# EAGLE board MMU_V101r3 (EAGLE 5.11), part 1 of 2
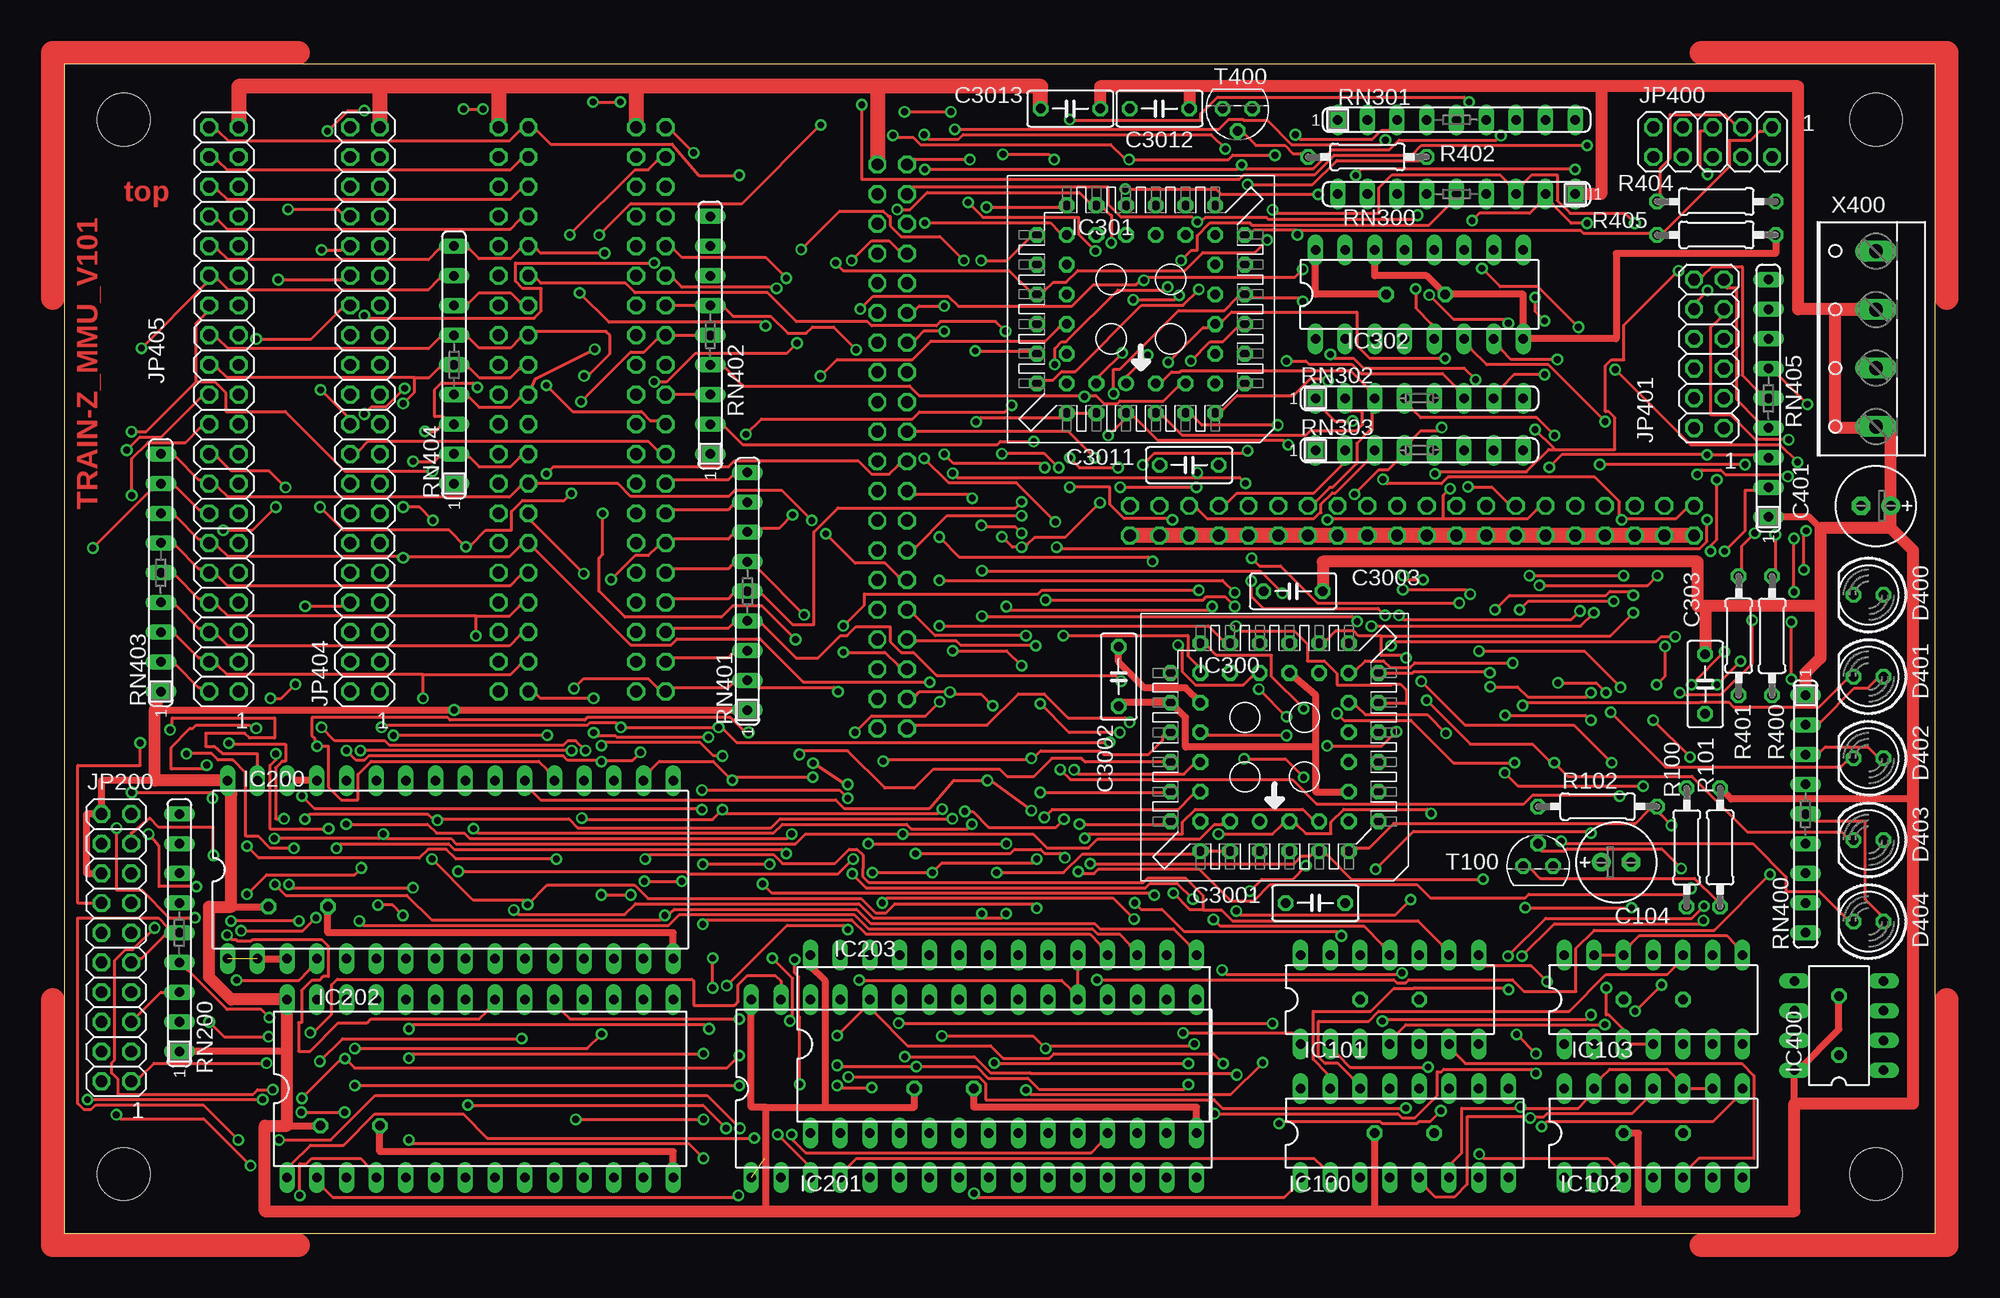
[diagram p0: board, top side]
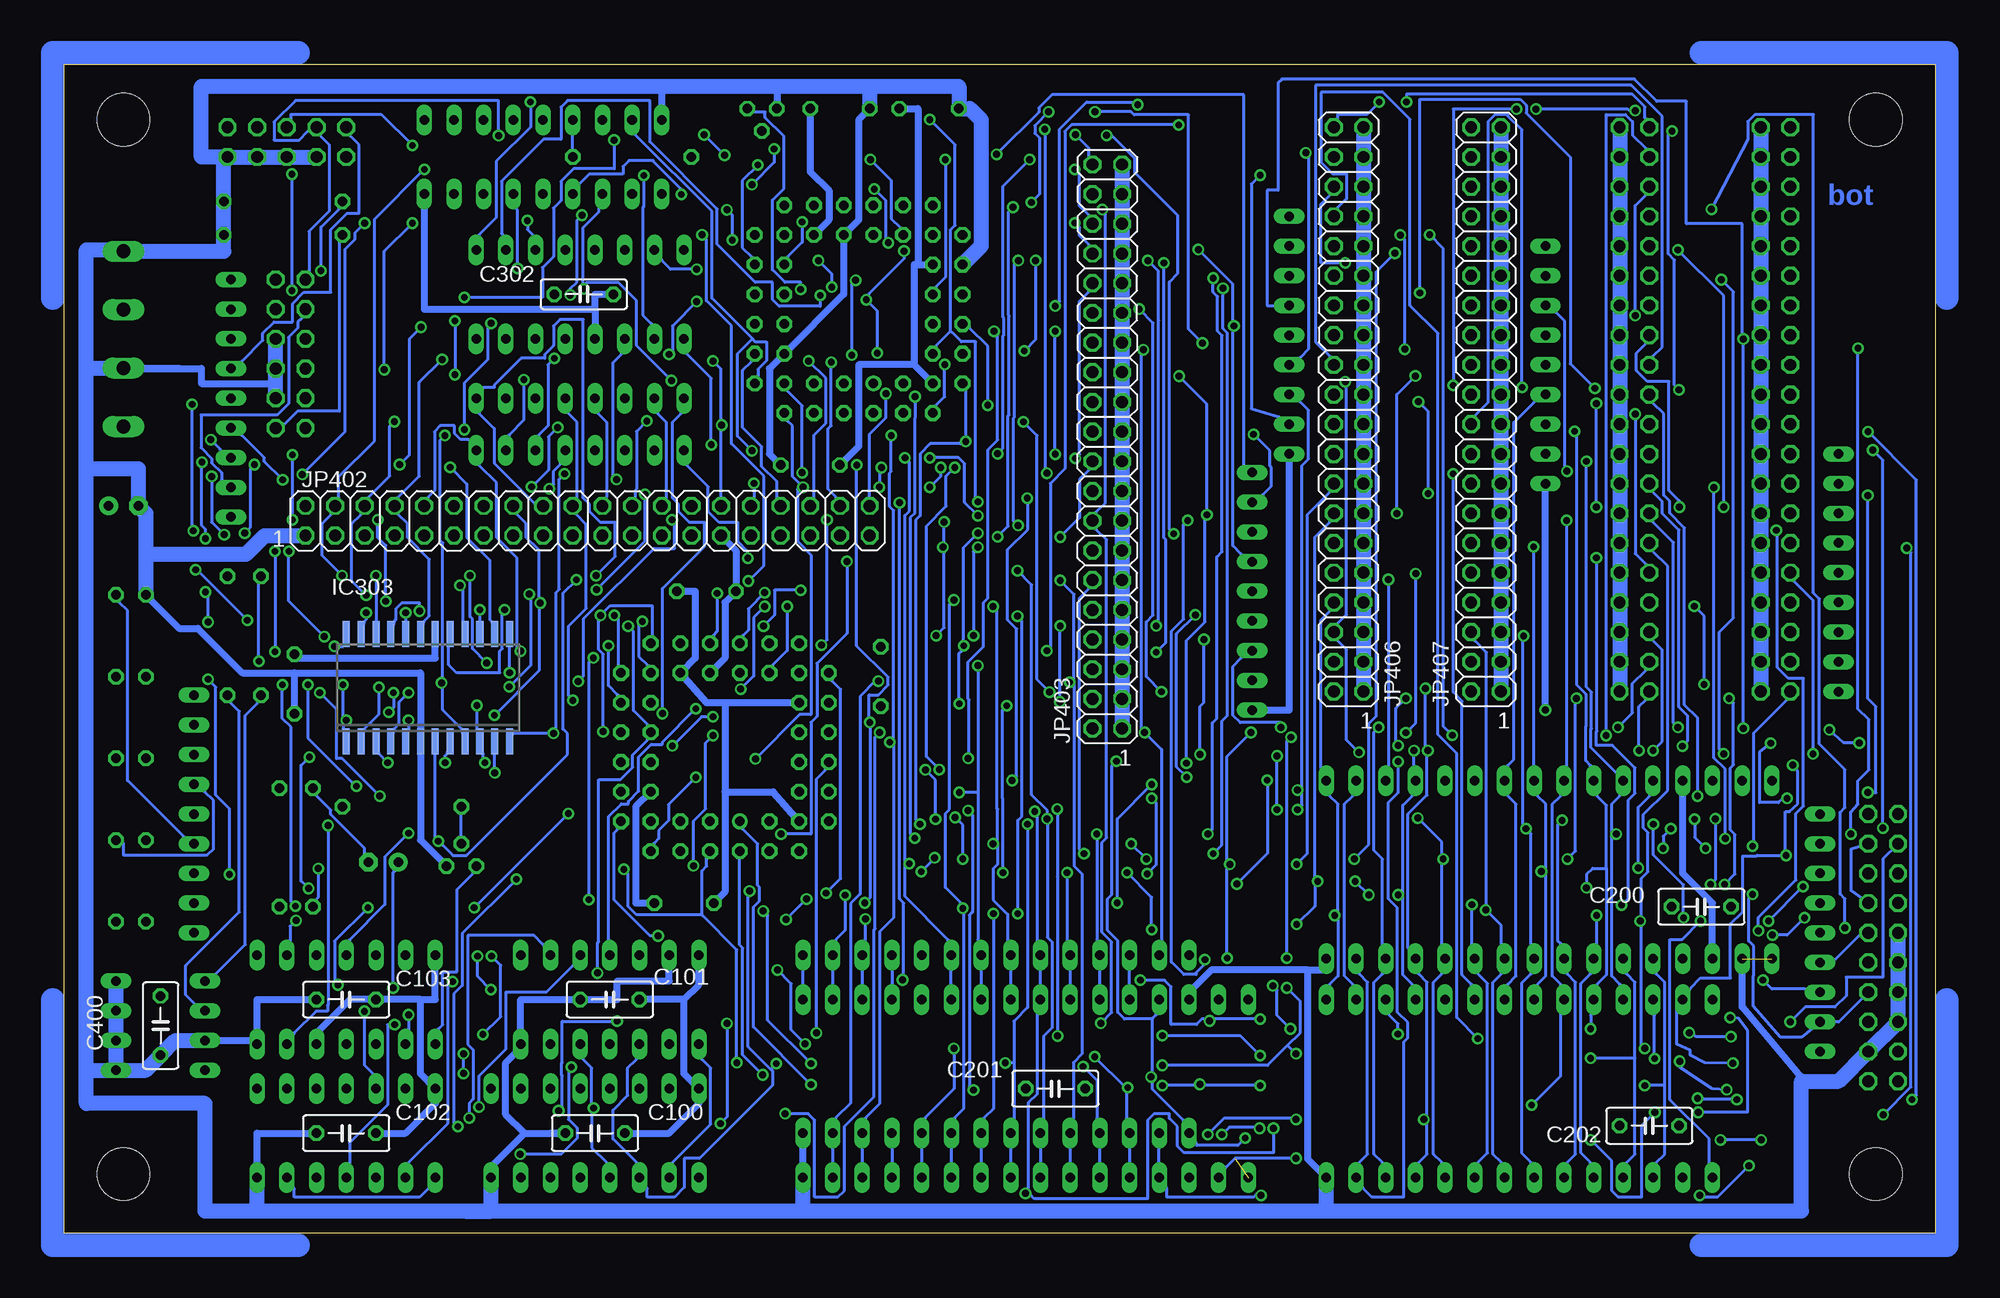
[diagram p1: board, bottom side, seen from below]

Size 160 x 100 mm. Coordinates in mm from the lower left corner, seen from the top.
Outline: 0,0 160,0 160,100 0,100 0,0
Copper layers (1*16): Top 0.035mm / dielectric 1.5mm / Bottom 0.035mm
Design rules "qprint_1": minimum track width 10mil, minimum drill 23mil, track to track 8mil, track to pad 8mil, pad to pad 8mil, via to via 8mil, smd to smd 8mil, copper to edge 40mil, drill to drill 8mil, minimum pad ring 10mil, minimum via ring 8mil, stop-mask expansion 4mil, vias tented up to drill 24mil, thermal gap 10mil
Net classes: 0 default: width 0.254 mm, clearance 0.203 mm; 1 +5V: width 1.016 mm, clearance 0.203 mm; 2 GND: width 1.27 mm, clearance 0.203 mm
Holes 4.5 mm at 5.08,95.25 5.08,5.08 154.94,5.08 154.94,95.25
tRestrict: 20 lines
bRestrict: 20 lines

## Footprints (pad centres in the part's own frame; a part is rotated, then mirrored left to right if it is on the bottom)
C050-030X075 = drill 0.813 octagon: 1 -2.54,0; 2 2.54,0
E2,5-7 = drill 0.813 pad 1.6 round: + -1.27,0 | drill 0.813 pad 1.6 octagon: - 1.27,0
C050-025X075 = drill 0.813 octagon: 1 -2.54,0; 2 2.54,0
LED5MM = drill 0.813 octagon: A -1.27,0; K 1.27,0
DIL16 = drill 0.813 long: 1 -8.89,-3.81; 2 -6.35,-3.81; 3 -3.81,-3.81; 4 -1.27,-3.81; 5 1.27,-3.81; 6 3.81,-3.81; 7 6.35,-3.81; 8 8.89,-3.81; 9 8.89,3.81; 10 6.35,3.81; 11 3.81,3.81; 12 1.27,3.81; 13 -1.27,3.81; 14 -3.81,3.81; 15 -6.35,3.81; 16 -8.89,3.81
DIL14 = drill 0.813 long: 1 -7.62,-3.81; 2 -5.08,-3.81; 3 -2.54,-3.81; 4 0,-3.81; 5 2.54,-3.81; 6 5.08,-3.81; 7 7.62,-3.81; 8 7.62,3.81; 9 5.08,3.81; 10 2.54,3.81; 11 0,3.81; 12 -2.54,3.81; 13 -5.08,3.81; 14 -7.62,3.81
DIL32 = drill 0.813 long: 1 -19.05,-7.62; 2 -16.51,-7.62; 3 -13.97,-7.62; 4 -11.43,-7.62; 5 -8.89,-7.62; 6 -6.35,-7.62; 7 -3.81,-7.62; 8 -1.27,-7.62; 9 1.27,-7.62; 10 3.81,-7.62; 11 6.35,-7.62; 12 8.89,-7.62; 13 11.43,-7.62; 14 13.97,-7.62; 15 16.51,-7.62; 16 19.05,-7.62; 17 19.05,7.62; 18 16.51,7.62; 19 13.97,7.62; 20 11.43,7.62; 21 8.89,7.62; 22 6.35,7.62; 23 3.81,7.62; 24 1.27,7.62; 25 -1.27,7.62; 26 -3.81,7.62; 27 -6.35,7.62; 28 -8.89,7.62; 29 -11.43,7.62; 30 -13.97,7.62; 31 -16.51,7.62; 32 -19.05,7.62
DIL28-6 = drill 0.813 long: 1 -16.51,-7.62; 2 -13.97,-7.62; 3 -11.43,-7.62; 4 -8.89,-7.62; 5 -6.35,-7.62; 6 -3.81,-7.62; 7 -1.27,-7.62; 8 1.27,-7.62; 9 3.81,-7.62; 10 6.35,-7.62; 11 8.89,-7.62; 12 11.43,-7.62; 13 13.97,-7.62; 14 16.51,-7.62; 15 16.51,7.62; 16 13.97,7.62; 17 11.43,7.62; 18 8.89,7.62; 19 6.35,7.62; 20 3.81,7.62; 21 1.27,7.62; 22 -1.27,7.62; 23 -3.81,7.62; 24 -6.35,7.62; 25 -8.89,7.62; 26 -11.43,7.62; 27 -13.97,7.62; 28 -16.51,7.62
PLCC-S44 = drill 0.813 pad 1.35 round: 1 1.27,6.35 | drill 0.813 pad 1.35 octagon: 2 -1.27,8.89; 3 -1.27,6.35; 4 -3.81,8.89; 5 -3.81,6.35; 6 -6.35,8.89; 7 -8.89,6.35; 8 -6.35,6.35; 9 -8.89,3.81; 10 -6.35,3.81; 11 -8.89,1.27; 12 -6.35,1.27; 13 -8.89,-1.27; 14 -6.35,-1.27; 15 -8.89,-3.81; 16 -6.35,-3.81; 17 -8.89,-6.35; 18 -6.35,-8.89; 19 -6.35,-6.35; 20 -3.81,-8.89; 21 -3.81,-6.35; 22 -1.27,-8.89; 23 -1.27,-6.35; 24 1.27,-8.89; 25 1.27,-6.35; 26 3.81,-8.89; 27 3.81,-6.35; 28 6.35,-8.89; 29 8.89,-6.35; 30 6.35,-6.35; 31 8.89,-3.81; 32 6.35,-3.81; 33 8.89,-1.27; 34 6.35,-1.27; 35 8.89,1.27; 36 6.35,1.27; 37 8.89,3.81; 38 6.35,3.81; 39 8.89,6.35; 40 6.35,8.89; 41 6.35,6.35; 42 3.81,8.89; 43 3.81,6.35; 44 1.27,8.89
SOIC24 = smd 0.6 x 2.2: 1 -6.985,-4.6; 2 -5.715,-4.6; 3 -4.445,-4.6; 4 -3.175,-4.6; 5 -1.905,-4.6; 6 -0.635,-4.6; 7 0.635,-4.6; 8 1.905,-4.6; 9 3.175,-4.6; 10 4.445,-4.6; 11 5.715,-4.6; 12 6.985,-4.6; 13 6.985,4.6; 14 5.715,4.6; 15 4.445,4.6; 16 3.175,4.6; 17 1.905,4.6; 18 0.635,4.6; 19 -0.635,4.6; 20 -1.905,4.6; 21 -3.175,4.6; 22 -4.445,4.6; 23 -5.715,4.6; 24 -6.985,4.6
DIL8 = drill 0.813 long: 1 -3.81,-3.81; 2 -1.27,-3.81; 3 1.27,-3.81; 4 3.81,-3.81; 5 3.81,3.81; 6 1.27,3.81; 7 -1.27,3.81; 8 -3.81,3.81
2X10 = drill 1.016 octagon: 1 -11.43,-1.27; 2 -11.43,1.27; 3 -8.89,-1.27; 4 -8.89,1.27; 5 -6.35,-1.27; 6 -6.35,1.27; 7 -3.81,-1.27; 8 -3.81,1.27; 9 -1.27,-1.27; 10 -1.27,1.27; 11 1.27,-1.27; 12 1.27,1.27; 13 3.81,-1.27; 14 3.81,1.27; 15 6.35,-1.27; 16 6.35,1.27; 17 8.89,-1.27; 18 8.89,1.27; 19 11.43,-1.27; 20 11.43,1.27
2X05 = drill 1.016 octagon: 1 -5.08,-1.27; 2 -5.08,1.27; 3 -2.54,-1.27; 4 -2.54,1.27; 5 0,-1.27; 6 0,1.27; 7 2.54,-1.27; 8 2.54,1.27; 9 5.08,-1.27; 10 5.08,1.27
2X06 = drill 1.016 octagon: 1 -6.35,-1.27; 2 -6.35,1.27; 3 -3.81,-1.27; 4 -3.81,1.27; 5 -1.27,-1.27; 6 -1.27,1.27; 7 1.27,-1.27; 8 1.27,1.27; 9 3.81,-1.27; 10 3.81,1.27; 11 6.35,-1.27; 12 6.35,1.27
2X20 = drill 1.016 octagon: 1 -24.13,-1.27; 2 -24.13,1.27; 3 -21.59,-1.27; 4 -21.59,1.27; 5 -19.05,-1.27; 6 -19.05,1.27; 7 -16.51,-1.27; 8 -16.51,1.27; 9 -13.97,-1.27; 10 -13.97,1.27; 11 -11.43,-1.27; 12 -11.43,1.27; 13 -8.89,-1.27; 14 -8.89,1.27; 15 -6.35,-1.27; 16 -6.35,1.27; 17 -3.81,-1.27; 18 -3.81,1.27; 19 -1.27,-1.27; 20 -1.27,1.27; 21 1.27,-1.27; 22 1.27,1.27; 23 3.81,-1.27; 24 3.81,1.27; 25 6.35,-1.27; 26 6.35,1.27; 27 8.89,-1.27; 28 8.89,1.27; 29 11.43,-1.27; 30 11.43,1.27; 31 13.97,-1.27; 32 13.97,1.27; 33 16.51,-1.27; 34 16.51,1.27; 35 19.05,-1.27; 36 19.05,1.27; 37 21.59,-1.27; 38 21.59,1.27; 39 24.13,-1.27; 40 24.13,1.27
0207/10 = drill 0.813 octagon: 1 -5.08,0; 2 5.08,0
SIL9 = drill 0.813 long: 1 -10.16,0; 2 -7.62,0; 3 -5.08,0; 4 -2.54,0; 5 0,0; 6 2.54,0; 7 5.08,0; 8 7.62,0; 9 10.16,0
SIL8 = drill 0.813 long: 1 -8.89,0; 2 -6.35,0; 3 -3.81,0; 4 -1.27,0; 5 1.27,0; 6 3.81,0; 7 6.35,0; 8 8.89,0
TO92 = drill 0.813 octagon: 1 1.27,0; 2 0,1.905; 3 -1.27,0
W237-4 = drill 1.194 long: 1 -7.5,-1.27; 2 -2.5,-1.27; 3 2.5,-1.27; 4 7.5,-1.27

## Placement (x,y rotation side)
C100  100n  [C050-030X075]  114.62,8.57 180 bottom
C101  100n  [C050-030X075]  113.35,20 180 bottom
C102  100n  [C050-030X075]  135.89,8.57 180 bottom
C103  100n  [C050-030X075]  135.89,20 180 bottom
C104  10µ/10V  [E2,5-7]  132.72,31.75 0 top
C200  100n  [C050-030X075]  20,27.94 180 bottom
C201  100n  [C050-030X075]  75.25,12.38 180 bottom
C202  100n  [C050-030X075]  24.45,9.21 180 bottom
C302  100n  [C050-025X075]  115.57,80.33 180 bottom
C303  100n  [C050-030X075]  140.34,46.99 270 top
C400  100n  [C050-030X075]  151.76,17.78 270 bottom
C401  100µ/10V  [E2,5-7]  154.94,62.23 180 top
C3001  100n  [C050-030X075]  107,28.26 0 top
C3002  100n  [C050-030X075]  90.17,47.62 270 top
C3003  100n  [C050-030X075]  105.09,54.93 180 top
C3011  100n  [C050-030X075]  96.2,65.72 0 top
C3012  100n  [C050-030X075]  93.66,96.2 180 top
C3013  100n  [C050-030X075]  86.04,96.2 180 top
D400  [LED5MM]  154.31,54.61 180 top
D401  [LED5MM]  154.31,47.62 180 top
D402  [LED5MM]  154.31,40.64 180 top
D403  [LED5MM]  154.31,33.66 180 top
D404  [LED5MM]  154.31,26.67 180 top
IC100  74LS138  [DIL16]  114.62,8.57 0 top
IC101  74LS04  [DIL14]  113.35,20 0 top
IC102  74LS10  [DIL14]  135.89,8.57 0 top
IC103  74LS00  [DIL14]  135.89,20 0 top
IC200  AM29F040 AMD  [DIL32]  33.02,31.11 0 top
IC201  AM29F040 AMD  [DIL32]  77.79,12.38 0 top
IC202  UM62256_DIP  [DIL28-6]  35.56,12.38 0 top
IC203  UM62256_DIP  [DIL28-6]  80.33,16.19 0 top
IC300  XC9536  [PLCC-S44]  103.5,41.59 180 top
IC301  XC9536  [PLCC-S44]  92.08,79.06 180 top
IC302  74LS193  [DIL16]  115.89,80.33 0 top
IC303  SN74BCT8240ADWR  [SOIC24]  128.91,46.67 0 bottom
IC400  24C08P  [DIL8]  151.76,17.78 90 top
JP200  flash conf.  [2X10]  4.45,24.45 90 top
JP400  JTAG  [2X05]  140.97,93.34 180 top
JP401  JTAG conf.  [2X06]  140.65,75.25 90 top
JP402  MON1  [2X20]  115.25,60.96 0 bottom
JP403  MON2  [2X20]  70.8,67.31 90 bottom
JP404  EXT_CTRL&DATA  [2X20]  25.72,70.48 90 top
JP405  EXT_CTRL&ADDR  [2X20]  13.65,70.48 90 top
JP406  EXT_CTRL&DATA  [2X20]  50.16,70.48 90 bottom
JP407  EXT_CTRL&ADDR  [2X20]  38.42,70.48 90 bottom
R100  10k  [0207/10]  141.6,33.02 90 top
R101  2k7  [0207/10]  138.75,33.02 270 top
R102  10k  [0207/10]  131.13,36.51 0 top
R400  160  [0207/10]  146.05,51.12 270 top
R401  160  [0207/10]  143.19,51.12 90 top
R402  2k7  [0207/10]  111.44,92.08 0 top
R404  330  [0207/10]  141.29,88.27 0 top
R405  330  [0207/10]  141.29,85.41 0 top
RN200  8x10k  [SIL9]  9.84,25.72 90 top
RN300  8x1k8  [SIL9]  119.06,88.9 180 top
RN301  8x220  [SIL9]  119.06,95.25 0 top
RN302  2k7  [SIL8]  115.89,71.44 0 top
RN303  2k7  [SIL8]  115.89,66.99 0 top
RN400  8x220  [SIL9]  148.91,35.88 270 top
RN401  8x10k  [SIL9]  58.42,54.93 90 top
RN402  8x10k  [SIL9]  55.24,76.83 90 top
RN403  8x10k  [SIL9]  8.26,56.52 90 top
RN404  8x10k  [SIL9]  33.34,74.3 90 top
RN405  8x4k7  [SIL9]  145.73,71.44 90 top
T100  BC548C  [TO92]  126.05,31.43 0 top
T400  BC548C  [TO92]  100.33,96.2 180 top
U$1  [A4L-LOC]  -15.24,-54.93 0 top  (outside the outline)
X400  PWR in  [W237-4]  153.67,76.52 90 top

## Library data of the parts
C100-C104 C200-C202 C302 C303 C400 C401 C3001-C3003 C3011-C3013 R100-R102 R400-R402 R404 R405 = rcl
D400-D404 = led
IC100-IC103 IC302 = 74ttl-din
IC200 IC201 = am29-memory_MBL
IC202 IC203 = memory-UM
IC300 IC301 = XILINX
IC303 = TI_SCOPE
IC400 = microchip
JP200 JP400-JP407 = pinhead
RN200 RN300-RN303 RN400-RN405 = resistor-sil
T100 T400 = transistor
U$1 = frames
X400 = con-wago-500

## Nets
+5V [+5V]: C100.1 C101.1 C102.1 C103.1 C200.1 C201.1 C202.1 C302.1 C303.1 C400.1 C401.+ C3001.1 C3002.1 C3003.1 C3011.1 C3012.1 C3013.1 IC100.16 IC101.14 IC102.14 IC103.5 IC103.14 IC200.32 IC201.32 IC202.28 IC203.28 IC300.21 IC300.32 IC300.41 IC301.21 IC301.32 IC301.41 IC302.4 IC302.16 IC303.18 IC400.8 JP200.16 JP200.20 R100.2 RN200.1 RN300.1 RN400.1 RN401.1 RN402.1 RN403.1 RN404.1 RN405.1 X400.1 X400.3
/A12: IC101.2 IC102.3
/A13: IC101.4 IC102.4
/A14: IC101.6 IC102.5
/A15: IC101.8 IC102.2
/CPU_BUSAK: JP404.38 JP406.38
/CPU_BUSREQ: JP404.36 JP406.36
/CPU_HALT: JP404.32 JP406.32
/CPU_INT: JP405.36 JP407.36
/CPU_IOREQ: JP404.24 JP406.24
/CPU_M1: JP404.20 JP406.20
/CPU_MREQ: IC101.11 IC300.28 JP404.22 JP406.22 RN402.3
/CPU_NMI: JP405.38 JP407.38
/CPU_RD: IC200.24 IC201.24 IC202.22 IC203.22 IC300.27 JP404.26 JP406.26 RN402.5
/CPU_RFSH: JP404.30 JP406.30
/CPU_WAIT: JP404.34 JP406.34
/CPU_WR: IC202.27 IC203.27 IC300.26 JP200.1 JP200.13 JP200.17 JP404.28 JP406.28 RN402.6
/CS_000-800H: IC103.11 IC200.22 IC300.2 JP403.18
/CS_000H: IC100.15 IC103.9
/CS_800H: IC100.14 IC103.10
/CS_1000-7000H: IC102.12 IC202.20 IC300.3 JP403.20
/CS_1000H: IC100.13
/CS_1800H: IC100.12
/CS_2000H: IC100.11
/CS_2800H: IC100.10
/CS_3000H: IC100.9
/CS_3800H: IC100.7
/CS_8000H-EOR: IC102.8 IC201.22 IC203.20 IC300.4 JP403.22
/CT_PL: IC301.28 IC302.11 JP403.10 RN300.2
/DRV_EN: IC301.27 IC303.1 IC303.24 JP403.12 RN301.3
/OSC_HALT: IC103.2 IC301.26 JP403.16 RN300.6
/SYS_RESET: IC300.39 IC301.39 JP405.40 JP407.40 RN402.2 T400.3
/TRST: JP400.9 JP403.28 RN405.6
/WE0: IC200.31 JP200.14
/WE1: IC201.31 JP200.18
A0: IC200.12 IC201.12 IC202.10 IC203.10 IC300.14 IC303.20 JP405.2 JP407.2 RN403.2
A1: IC200.11 IC201.11 IC202.9 IC203.9 IC300.18 IC303.21 JP405.4 JP407.4 RN403.3
A2: IC200.10 IC201.10 IC202.8 IC203.8 IC300.19 IC303.22 JP405.6 JP407.6 RN403.4
A3: IC200.9 IC201.9 IC202.7 IC203.7 IC300.20 IC303.23 JP405.8 JP407.8 RN403.5
A4: IC200.8 IC201.8 IC202.6 IC203.6 IC300.22 JP405.10 JP407.10 RN403.6
A5: IC200.7 IC201.7 IC202.5 IC203.5 IC300.24 JP405.12 JP407.12 RN403.7
A6: IC200.6 IC201.6 IC202.4 IC203.4 IC300.1 JP405.14 JP407.14 RN403.8
A7: IC200.5 IC201.5 IC202.3 IC203.3 IC300.44 JP405.16 JP407.16 RN403.9
A8: IC200.27 IC201.27 IC202.25 IC203.25 IC300.43 JP405.18 JP407.18 RN404.2
A9: IC200.26 IC201.26 IC202.24 IC203.24 IC300.38 JP405.20 JP407.20 RN404.3
A10: IC200.23 IC201.23 IC202.21 IC203.21 IC300.37 JP405.22 JP407.22 RN404.4
A11: IC100.1 IC200.25 IC201.25 IC202.23 IC203.23 IC300.36 JP405.24 JP407.24 RN404.5
A12: IC100.2 IC101.1 IC201.4 IC202.2 IC203.2 IC300.35 JP405.26 JP407.26 RN404.6
A12ORA13ORA14: IC102.1 IC102.6
A13: IC100.3 IC101.3 IC201.28 IC202.26 IC203.26 IC300.34 JP405.28 JP407.28 RN404.7
A14: IC100.4 IC101.5 IC201.29 IC202.1 IC203.1 IC300.33 JP405.30 JP407.30 RN404.8
A15: IC100.5 IC101.9 IC102.11 IC300.29 JP405.32 JP407.32 RN404.9
C14+: C104.+ IC103.3 IC103.4
C14-: C104.- R101.1
CPU_CLK: IC300.5 IC301.5 JP404.40 JP406.40 RN402.4
CS_000-800H: IC103.8 IC103.12 IC103.13
CT_D0: IC302.3 IC303.15 JP402.2
CT_D1: IC302.2 IC303.16 JP402.4
CT_D2: IC302.6 IC303.17 JP402.6
CT_D3: IC302.7 IC303.19 JP402.8
D0: IC200.13 IC201.13 IC202.11 IC203.11 IC301.1 IC302.15 JP404.2 JP406.2 RN401.2
D1: IC200.14 IC201.14 IC202.12 IC203.12 IC301.44 IC302.1 JP404.4 JP406.4 RN401.3
D2: IC200.15 IC201.15 IC202.13 IC203.13 IC301.43 IC302.10 JP404.6 JP406.6 RN401.4
D3: IC200.17 IC201.17 IC202.15 IC203.15 IC301.38 IC302.9 JP404.8 JP406.8 RN401.5
D4: IC200.18 IC201.18 IC202.16 IC203.16 IC301.37 JP404.10 JP406.10 RN401.6
D4_A: D400.A RN400.6
D5: IC200.19 IC201.19 IC202.17 IC203.17 IC301.36 JP404.12 JP406.12 RN401.7
D6: IC200.20 IC201.20 IC202.18 IC203.18 IC301.35 JP404.14 JP406.14 RN401.8
D7: IC200.21 IC201.21 IC202.19 IC203.19 IC301.34 JP404.16 JP406.16 RN401.9
EXT_IEI: JP405.34 JP407.34
GND [GND]: C100.2 C101.2 C102.2 C103.2 C200.2 C201.2 C202.2 C302.2 C303.2 C400.2 C401.- C3001.2 C3002.2 C3003.2 C3011.2 C3012.2 C3013.2 D400.K IC100.8 IC101.7 IC101.13 IC102.7 IC103.7 IC200.1 IC200.2 IC200.3 IC200.16 IC200.29 IC200.30 IC201.16 IC201.30 IC202.14 IC203.14 IC300.10 IC300.23 IC300.31 IC301.10 IC301.23 IC301.31 IC302.8 IC302.14 IC303.6 IC400.1 IC400.2 IC400.3 IC400.4 IC400.7 JP200.3 JP200.6 JP200.8 JP200.10 JP200.12 JP400.2 JP400.4 JP400.6 JP400.8 JP401.3 JP401.5 JP401.7 JP402.1 JP402.3 JP402.5 JP402.7 JP402.9 JP402.11 JP402.13 JP402.15 JP402.17 JP402.19 JP402.21 JP402.23 JP402.25 JP402.27 JP402.29 JP402.31 JP402.33 JP402.35 JP402.37 JP402.39 JP403.1 JP403.3 JP403.5 JP403.7 JP403.9 JP403.11 JP403.13 JP403.15 JP403.17 JP403.19 JP403.21 JP403.23 JP403.25 JP403.27 JP403.29 JP403.31 JP403.33 JP403.35 JP403.37 JP403.39 JP404.1 JP404.3 JP404.5 JP404.7 JP404.9 JP404.11 JP404.13 JP404.15 JP404.17 JP404.19 JP404.21 JP404.23 JP404.25 JP404.27 JP404.29 JP404.31 JP404.33 JP404.35 JP404.37 JP404.39 JP405.1 JP405.3 JP405.5 JP405.7 JP405.9 JP405.11 JP405.13 JP405.15 JP405.17 JP405.19 JP405.21 JP405.23 JP405.25 JP405.27 JP405.29 JP405.31 JP405.33 JP405.35 JP405.37 JP405.39 JP406.1 JP406.3 JP406.5 JP406.7 JP406.9 JP406.11 JP406.13 JP406.15 JP406.17 JP406.19 JP406.21 JP406.23 JP406.25 JP406.27 JP406.29 JP406.31 JP406.33 JP406.35 JP406.37 JP406.39 JP407.1 JP407.3 JP407.5 JP407.7 JP407.9 JP407.11 JP407.13 JP407.15 JP407.17 JP407.19 JP407.21 JP407.23 JP407.25 JP407.27 JP407.29 JP407.31 JP407.33 JP407.35 JP407.37 JP407.39 R404.2 R405.2 RN301.1 T100.1 T400.1 X400.2 X400.4
LED0: D401.K IC303.10 JP402.24 RN302.1
LED0_K: D401.A RN400.2
LED0_R: IC301.2 JP402.26 RN302.2
LED1: D402.K IC303.9 JP402.22 RN302.4
LED1_K: D402.A RN400.3
LED1_R: IC301.3 JP402.28 RN302.3
LED2: D403.K IC303.8 JP402.20 RN302.5
LED2_K: D403.A RN400.4
LED2_R: IC301.4 JP402.30 RN302.6
LED3: D404.K IC303.7 JP402.18 RN302.8
LED3_K: D404.A RN400.5
LED3_R: IC301.8 JP402.32 RN302.7
LED4: IC303.5 JP402.16 RN303.1
LED4_R: IC301.9 JP402.34 RN303.2
LED5: IC303.4 JP402.14 RN303.4
LED5_R: IC301.11 JP402.36 RN303.3
LED6: IC303.3 JP402.12 RN303.5
LED6_R: IC301.12 JP402.38 RN303.6
LED7: IC303.2 JP402.10 RN303.8
LED7_R: IC301.13 JP402.40 RN303.7
MREQ: IC100.6 IC101.10 IC102.9 IC102.10 IC102.13
OSC_OUT: IC103.6 IC300.6 IC301.6 IC302.5 JP403.14 R102.2 RN300.7
PD1: IC300.7 IC301.7 JP403.2 RN301.2
PU1: IC300.40 IC300.42 IC301.40 IC301.42 JP403.4 RN300.5
RST: IC300.25 JP403.40 R402.2 RN301.4
RSVD0: JP404.18 JP406.18
SCL: IC301.29 JP403.8 R401.2 RN300.4
SCL_R: IC400.6 R400.2
SDA: IC301.33 JP403.6 R400.1 RN300.3
SDA_R: IC400.5 R401.1
SEL0: IC200.4 JP200.5 RN200.3
SEL1: IC200.28 JP200.7 RN200.2
SEL10: IC201.3 JP200.9 RN200.5
SEL11: IC201.1 IC201.2 JP200.11 RN200.4
T1_B: R101.2 R102.1 T100.2
T1_C: IC103.1 R100.1 T100.3
T2_B: R402.1 T400.2
TCK: IC300.17 IC301.17 IC303.13 JP400.1 JP401.1 R405.1
TDI: IC301.15 JP400.7 JP401.12 JP403.36 RN405.5
TDI_AC: IC300.15 IC301.30 JP401.11 JP403.34 RN405.4
TDI_DRV: IC300.30 IC303.14 JP401.9 JP403.32 RN405.3
TDO: IC303.11 JP400.5 JP401.10 JP403.30 RN405.2
TMS: IC300.16 IC301.16 IC303.12 JP400.3 JP403.38 R404.1

## Tracks (layer width: path | path; a pad name or v marks a point on that pad's centre or on a via)
+5V  (via drill 0.6)
  Top 0.61: C3002.1 90.17,48.9 92.39,46.67 95.89,46.67 IC300.32 | 7.75,44.77 v33.34,44.77 RN401.1 | IC302.16 107,80.33 C302.1 | C400.1 151.76,17.46 148.27,13.97 IC400.8 147.96,11.11 | 14.28,27.94 C200.1 | 19.05,9.21 C202.1 | 60.01,10.79 65.09,10.79 | 65.09,10.79 72.71,10.79 C201.1 | IC201.32 58.74,10.79 60.01,10.79 | IC203.28 63.82,22.86 65.09,21.59 65.09,10.79 | 60.01,1.91 60.01,10.79 | 7.75,38.73 3.17,38.73 JP200.20 1.89,35.88 1.89,30.8 JP200.16 | 150.18,60.33 149.22,61.28 RN405.1 | 19.05,15.56 RN200.1 | 112.08,1.91 C100.1 | 134.62,1.91 134.62,8.57 C102.1 | 158.12,37.15 142.56,37.15 R100.2
  Top 1.016: 156.21,60.33 C401.+ 156.21,69.02 X400.1 154.94,68.9 151.45,68.9 151.45,79.02 X400.3 154.94,79.06 148.27,79.06 148.27,98.11 131.44,98.11 | 156.21,60.33 158.12,58.42 158.12,37.15 158.12,11.11 147.96,11.11 147.96,1.91 134.62,1.91 112.08,1.91 60.01,1.91 17.14,1.91 17.14,9.21 19.05,9.21 19.05,15.56 IC202.28 14.29,20 12.38,21.91 12.38,27.94 14.28,27.94 14.28,37.57 13.97,37.9 IC200.32 7.75,38.73 7.75,44.77 RN403.1 | 156.21,60.33 150.18,60.33 150.18,53.66 | RN400.1 148.91,47.94 150.18,49.21 150.18,53.66 | 131.44,98.11 96.2,98.11 | C3013.1 88.58,98.11 96.2,98.11 | 96.2,98.11 C3012.1 | RN300.1 131.44,88.9 131.44,98.11 | C3003.1 107.63,57.47 139.7,57.47 139.7,53.66 140.34,53.66 | 150.18,53.66 140.34,53.66 | 140.34,53.66 C303.1
  Bottom 0.61: C3003.1 106.05,54.93 106.05,49.21 IC300.21 105.09,45.4 103.5,45.4 | C3001.1 103.5,29.21 103.5,37.78 | 103.5,45.4 103.5,37.78 | 103.5,37.78 99.38,37.78 IC300.41 | C3011.1 92.08,67.31 92.08,74.3 87.31,74.3 | 87.31,74.3 IC301.41 | C3012.1 96.2,90.81 94.61,89.22 94.61,86.68 IC301.21 | C3013.1 87,96.2 87,82.87 | v33.34,44.77 RN404.1 | 103.5,45.4 IC300.32 | C302.1 114.62,80.33 114.62,79.06 | 114.62,79.06 IC302.4 | 87,82.87 IC301.32 | 87,82.87 87.31,82.87 87.31,74.3 | RN402.1 55.24,44.77 RN401.1 | 107,20 C101.1 | 107,20 105.73,21.27 IC101.14 | C100.1 108.27,8.57 105.73,11.11 IC100.16 107,13.65 107,20 | 114.62,79.06 129.22,79.06 RN300.1 | IC103.14 128.27,20 129.54,20 | 129.54,20 C103.1 135.57,20 138.43,17.14 IC103.5 | C303.1 140.34,49.21 128.27,49.21 IC303.18 | 129.54,20 129.54,13.65 IC102.14 128.27,11.11 130.81,8.57 C102.1
/A12  (via drill 0.58)
  Top 0.254: v116.64,14.22 109.96,14.22 108.92,15.27 IC101.2 | v121.01,6.78 121.36,6.43 132,6.43 132.72,5.71 IC102.3
  Bottom 0.254: v116.64,14.22 116.89,13.97 116.89,9.75 116.15,9.02 116.15,8.13 117.5,6.78 v121.01,6.78
/A13  (via drill 0.58)
  Top 0.254: v131.75,17.86 114.73,17.86 114,17.12 IC101.4
  Bottom 0.254: v131.75,17.86 132.36,17.86 132.36,11 135.61,7.75 135.61,6.07 IC102.4
/A14
  Top 0.254: IC101.6 119.08,15.27 119.81,14.53 143.46,14.53 144.5,13.49 144.5,6.43 139.78,6.43 139.06,5.71 IC102.5
/A15  (via drill 0.58)
  Top 0.254: v126.8,21.54 125.45,22.89 121.61,22.89 IC101.8
  Bottom 0.254: v126.8,21.54 127.18,21.16 127.18,9.42 130.53,6.07 IC102.2
/CPU_BUSAK  (via drill 0.58)
  Top 0.254: v28.14,42.6 28.17,42.62 v41.3,42.62 | v43.23,85.42 48.79,90.98 49.94,90.98 50.7,91.75 JP406.38
  Bottom 0.254: v28.14,42.6 28.14,95.71 26.49,95.71 25.88,95.1 25.88,93.93 24.77,92.81 JP404.38 | v41.3,42.62 42.06,43.38 42.06,84.25 v43.23,85.42
/CPU_BUSREQ  (via drill 0.58)
  Top 0.254: v25.65,78.51 25.88,78.28 40.18,78.28 40.79,78.89 40.79,80.82 39.19,80.82 38.58,81.43 38.58,83.01 v50.44,83.01
  Bottom 0.254: v25.65,78.51 25.65,87.91 24.77,88.8 JP404.36 | v50.44,83.01 52.53,83.01 52.53,88.04 51.77,88.8 JP406.36
/CPU_HALT  (via drill 0.58)
  Top 0.254: v22,84.12 23.67,84.12 23.7,84.15 JP404.32 | v18.09,62.13 16.1,60.15 v13.59,60.15 | v15.11,25.88 20.4,25.88 v21.51,27 | v24.11,35 31.06,35 31.83,34.24 34.21,34.24 34.67,33.78 61.82,33.78 v62.2,34.16 | v61.75,81.71 59.99,83.46 52.83,83.46 52.17,84.12 JP406.32
  Bottom 0.254: v22,84.12 18.09,80.21 v18.09,62.13 | v13.59,60.15 13.49,60.05 13.49,48.41 12.55,47.47 11.28,47.47 11.28,36.55 11.91,35.92 11.91,30.23 15.11,27.03 v15.11,25.88 | v21.51,27 21.54,27.03 21.54,29.82 24.11,32.38 v24.11,35 | v62.2,34.16 61.82,34.54 61.82,43.66 61.44,44.04 61.44,57.86 60.98,58.32 60.98,76.81 61.37,77.19 61.37,80.14 61.75,80.52 v61.75,81.71
/CPU_INT
  Top 0.254: JP405.36 13.13,89.23 13.92,88.44 38.15,88.44 38.94,89.23 JP407.36
/CPU_IOREQ
  Bottom 0.254: JP404.24 24.13,75.03 23.34,75.82 23.34,95.56 26,98.21 52.98,98.21 52.98,76.25 51.77,75.03 JP406.24
/CPU_M1  (via drill 0.58)
  Top 0.254: v21.92,72.16 24.13,69.95 JP404.20 | v22.5,94.28 24.26,96.04 v25.65,96.04 | v34.14,96.16 v35.81,96.16 | v41.22,72.54 43.46,70.31 49.35,70.31 50.11,69.55 50.7,69.55 JP406.20
  Bottom 0.254: v21.92,72.16 22.3,72.54 22.3,83.26 22.84,83.8 22.84,93.95 v22.5,94.28 | v25.65,96.04 26.16,96.04 26.29,96.16 v34.14,96.16 | v35.81,96.16 41.22,96.16 v41.22,72.54
/CPU_MREQ  (via drill 0.58)
  Top 0.254: v105.99,44.88 103.25,47.62 103.25,49.45 98.55,49.45 97.81,50.19 IC300.28 | RN402.3 JP406.22 | v20.32,37.41 21.36,36.37 54.41,36.37 v54.53,36.25 | v98.27,26.85 98.83,26.29 111.15,26.29 112.7,24.74 IC101.11 | v96.52,28.6 95.17,29.95 92.86,29.95 92.48,29.57 68.58,29.57 v67.39,30.76 | v67,37.21 66.29,37.92 v54.53,37.92
  Bottom 0.254: v105.99,44.88 108.84,42.04 108.84,41.83 109.8,41.83 110.87,40.77 110.87,37.85 111.76,36.96 111.76,36.75 112.34,36.75 113.44,35.66 113.44,25.12 IC101.11 | v20.32,37.41 20.32,44.09 21.44,45.21 21.44,60.35 22.71,61.62 22.71,62.64 23.22,63.14 23.22,70.1 24.13,71.02 JP404.22 | v54.53,36.25 54.15,36.63 54.15,37.92 | 54.15,37.92 54.15,65.68 53.59,66.24 53.59,70.41 54.3,71.12 RN402.3 | v96.52,28.6 v98.27,26.85 | v67.39,30.76 66.62,31.52 66.62,36.83 v67,37.21 | 54.15,37.92 v54.53,37.92
/CPU_NMI
  Top 0.254: JP405.38 13.13,91.77 13.92,90.98 38.15,90.98 38.94,91.77 JP407.38
/CPU_RD  (via drill 0.58)
  Top 0.254: v98.17,53.62 97.89,53.34 80.85,53.34 v80.57,53.62 | RN402.5 JP406.26 50.7,76.5 49.58,75.39 48.44,75.39 v44.2,71.14 | v21.87,62.13 23.85,60.15 32.92,60.15 v34.34,58.73 34.82,58.93 36.04,60.15 38.25,60.15 38.25,61.75 39.19,62.69 42.75,62.69 v43.36,63.3 | v68.76,33.33 v80.57,33.33 | v67.46,32.03 66.17,30.73 53.37,30.73 53.14,30.96 v33.68,30.96
  Bottom 0.254: IC201.24 79.07,21.31 79.07,22.5 IC203.22 79.32,25.12 79.32,27.3 80.57,28.55 80.57,31.19 80.19,31.57 80.19,33.33 | v98.17,53.62 98.17,49.86 99.42,48.62 IC300.27 | v80.57,53.62 80.24,53.29 80.24,36.32 80.19,36.27 80.19,33.33 | 33.3,30.96 33.3,36.73 34.01,37.44 IC200.24 34.34,40.03 v34.34,58.73 | 33.3,30.96 33.3,22.02 34.01,21.31 IC202.22 | v21.87,62.13 21.87,62.66 22.76,63.55 22.76,72.87 24.61,72.87 25.55,73.81 25.55,75.31 24.77,76.1 JP404.26 | v44.2,71.14 43.36,70.31 v43.36,63.3 | v67.46,32.03 v68.76,33.33 | v80.57,33.33 80.19,33.33 | 33.3,30.96 v33.68,30.96
/CPU_RFSH  (via drill 0.58)
  Top 0.254: v18.29,81.58 23.67,81.58 23.7,81.61 JP404.30 | v18.09,41.02 18.09,40.51 17.6,40.03 17.6,34.62 20.22,34.62 20.24,34.59 22.58,34.59 v22.61,34.62 | v23.27,32.94 23.65,33.33 32.87,33.33 33.33,32.87 61.37,32.87 v61.75,32.49 | v60.91,80.85 60.83,80.92 52.83,80.92 52.17,81.58 JP406.30
  Bottom 0.254: v18.29,81.58 17.25,80.54 17.25,52.65 18.47,51.44 18.47,41.4 v18.09,41.02 | v22.61,34.62 23.27,33.96 v23.27,32.94 | v61.75,32.49 61.01,33.22 61.01,43.81 60.53,44.3 60.53,77.01 60.91,77.39 v60.91,80.85
/CPU_WAIT  (via drill 0.58)
  Top 0.254: v19.14,87.61 23.39,87.61 23.7,87.3 JP404.34 | v7.72,26.14 5.87,24.28 5.23,24.28 4.29,23.34 4.29,14.83 4.06,14.61 4.06,13.69 4.09,13.69 4.6,13.18 4.6,11.91 16.15,11.91 16.54,12.29 v17.83,12.29 | v21.84,14.72 23.79,16.66 v39.12,16.66
  Bottom 0.254: v19.14,87.61 16.03,93.57 16.03,95.1 15.42,95.71 10.41,95.71 10.41,54.79 9.91,54.28 9.91,41.86 7.72,39.67 7.72,36.42 8.13,36.02 8.13,29.03 7.72,28.63 v7.72,26.14 | v17.83,12.29 19.05,12.38 21.84,14.22 v21.84,14.72 | v39.12,16.66 40.92,18.47 40.92,41.07 42.52,42.67 42.52,76.99 44.91,79.38 44.91,95.3 47.22,97.61 52.53,97.61 52.53,91.62 51.54,90.63 50.34,90.63 50.34,88.49 51.1,87.73 JP406.34
/CPU_WR  (via drill 0.58, 0.6)
  Top 0.254: v17.3,14.55 7.67,14.55 6.45,13.34 JP200.1 | v16.41,76.5 21.13,76.5 23.7,79.07 JP404.28 | v12.75,32.33 12.75,34.75 8.08,34.75 7.29,35.53 5.71,34.23 JP200.17 | JP406.28 RN402.6 56.54,79.1 57.17,78.46 60.4,78.46 61.87,76.99 63.45,76.99 63.98,77.52 65.79,77.52 v67.72,75.59 | v74.83,51.97 97.84,51.97 99.03,50.77 IC300.26 | v74.85,45.47 73.66,44.27 69.04,44.27 v67.61,42.85 | v16.41,43.2 16.13,43.2 15.85,43.48 11.28,43.48 11,43.2 10.74,43.2 9.14,41.55 9.14,39.73 11.89,39.73 v12.17,40.06
  Bottom 0.254: JP200.13 7.21,29.34 7.21,32.87 JP200.17 | v17.3,14.55 19.68,14.61 20.95,15.24 20.95,15.67 22.11,16.18 22.11,19.48 IC202.27 20.95,20.95 20.07,21.84 17.5,21.84 17.5,26.47 16.46,27.51 16.46,32.28 15.29,32.28 15.24,32.33 v12.75,32.33 12.8,32.33 | v74.83,51.97 74.85,51.94 v74.85,45.47 | IC203.27 66.17,25.12 66.17,41.4 v67.61,42.85 67.92,43.23 67.92,75.39 v67.72,75.59 | RN402.6 57.15,79.38 57.15,89.22 56.2,89.22 56.2,98.42 55.88,98.74 25.72,98.74 23.81,96.84 21.27,96.84 21.27,86.36 16.51,86.36 16.51,76.52 16.42,76.52 v16.41,76.5 v16.41,43.2 | v12.17,40.06 11.76,39.5 11.76,36.75 12.47,36.09 12.8,36.09 12.8,32.33 | 12.8,32.33 12.8,32.31
/CS_000-800H  (via drill 0.58)
  Top 0.254: v130.56,34.24 130.4,34.39 115.39,34.39 v112.14,31.14 | v77.65,62.89 77.34,63.2 72.82,63.2 JP403.18 | IC200.22 40.01,37.8 40.72,37.08 65.96,37.08 66.67,36.37 73.99,36.37 76.05,38.75 v78.94,38.75 79.08,38.84 v82.7,36.17 | v102.49,14.61 99.77,11.89 82.63,11.89 v82.25,12.27
  Bottom 0.254: v130.56,34.24 132.59,32.21 132.59,28.14 135.61,25.12 IC103.11 | v112.14,31.14 111.78,30.79 111.78,27.99 111.05,27.25 105.46,27.25 | 105.46,27.25 105.46,31.01 105.05,31.42 105.05,32.03 IC300.2 | v78.94,38.75 78.56,39.13 78.56,51.71 79.32,52.48 79.32,58.5 77.6,60.22 77.6,62.84 v77.65,62.89 | v102.49,14.61 102.49,24.26 105.39,27.15 105.46,27.25 | v82.25,12.27 82.6,12.62 82.6,27.2 82.32,27.48 82.32,35.79 v82.7,36.17
/CS_000H  (via drill 0.58)
  Top 0.254: v123.52,20.85 123.37,21.01 115.44,21.01 115.42,20.98 113.72,20.98 111.73,19 106.81,19 106.81,14.88 108,13.69 IC100.15 | v124.66,23.72 127.43,26.49 139.9,26.49 v140.18,26.77
  Bottom 0.254: v123.52,20.85 124.66,22 v124.66,23.72 | v140.18,26.77 140.69,26.26 140.69,25.12 IC103.9
/CS_800H
  Top 0.254: IC100.14 110.16,13.31 108.94,14.53 107.82,14.53 107.26,15.09 107.26,18.16 111.56,18.16 112.39,19 128.7,19 131.85,22.15 137.08,22.15 137.79,22.86 IC103.10
/CS_1000-7000H  (via drill 0.58)
  Top 0.254: v136.6,21.26 v134.34,19 | v124.94,27.86 v134.04,27.86 | v116.89,35.92 116.53,36.27 109.42,36.27 108.33,35.18 108.33,34.21 106.17,34.21 105.44,34.95 IC300.3 104.11,34.95 103.33,34.16 v98.7,34.16 | v41.22,64.97 41.83,65.58 56.82,65.58 57.33,66.09 67.89,66.09 69.04,64.95 70.54,64.95 71.32,65.73 JP403.20 | v93.07,57.48 92.69,57.86 76.53,57.86 v74.83,59.56
  Bottom 0.254: v134.34,19 134.34,14.4 133.63,13.69 IC102.12 | v136.6,21.26 136.88,21.54 136.88,25.02 v134.04,27.86 | v116.89,35.92 v124.94,27.86 | v41.22,64.97 41.22,46.3 40.46,45.54 40.46,22.12 39.65,21.31 IC202.20 | v98.7,34.16 96.14,34.16 96.14,43.71 95.63,44.22 95.63,48.77 93.07,51.33 v93.07,57.48 | v74.83,59.56 73.18,61.21 73.18,64.52 72.39,65.3 JP403.20
/CS_8000H-EOR  (via drill 0.58)
  Top 0.254: v126.34,9.14 126.36,9.14 126.8,9.58 141.02,9.58 142.88,11.43 IC102.8 | v121.34,30.3 110.08,30.3 107.97,32.41 IC300.4 106.66,32.41 106.53,32.28 105.82,32.28 105.16,31.62 v87.73,31.62 | v88.11,66.34 85.88,68.58 JP403.22
  Bottom 0.254: v126.34,9.14 126.69,9.5 126.69,20.47 125.96,21.21 125.96,25.68 v121.34,30.3 | IC201.22 84.15,21.31 84.15,22.5 IC203.20 84.4,25.12 88.11,28.83 88.11,31.62 | v88.11,66.34 87.73,65.96 87.73,61.8 88.11,61.42 88.11,31.62 | 88.11,31.62 v87.73,31.62
/CT_PL  (via drill 0.58)
  Top 0.254: v120.4,86.64 121.01,87.25 125.32,87.25 126.03,87.96 RN300.2 127.33,87.96 128.88,86.41 v130.23,86.41 | v78.87,87.78 85.06,87.78 IC301.28 | v80.19,59.59 81.08,58.7 v81.86,58.7 82.35,58.9 82.98,59.54 85.6,59.54 v88.57,62.51 | v82.25,51.13 74.47,51.13 72.69,52.91 JP403.10 | v132.64,73.89 139.09,67.44 146.76,67.44 v148.23,65.96 | v147.93,54.86 v147.93,59.44 | v147.7,47.4 v147.7,52.3 | v145.87,30.71 141.1,25.93 130.84,25.93 129.29,24.38 129.29,20.7 124.84,20.7 123.85,21.69 114.99,21.69 114.73,21.44 113.94,21.44 113.69,21.69 v88.32,21.69
  Bottom 0.254: v120.4,86.64 120.4,85.88 119.96,85.45 IC302.11 | v78.87,87.78 79.25,87.4 79.25,78.54 79.2,78.49 79.2,70.03 79.27,69.95 79.27,60.5 v80.19,59.59 | v81.86,58.7 82.25,58.32 v82.25,51.13 | v130.23,86.41 132.64,84 v132.64,73.89 | v148.23,65.96 148.23,60.53 147.93,60.22 v147.93,59.44 | v147.93,54.86 147.7,54.63 v147.7,52.3 | v147.7,47.4 147.04,46.74 147.04,37.49 145.87,36.32 v145.87,30.71 | v88.32,21.69 88.21,21.79 88.21,28.27 88.57,28.63 v88.57,62.51
/DRV_EN  (via drill 0.58)
  Top 0.254: v136.17,46.94 136.91,47.68 v136.91,50.22 | v105.28,93.98 105.66,93.6 111.89,93.6 112.65,94.36 113.33,94.36 RN301.3 | v103.53,92.23 99.92,92.23 99.54,91.85 v91.06,91.85 90.58,92.05 89.48,93.14 73.2,93.14 72.59,93.75 71.04,93.75 v70.87,93.93 | v65.13,59.84 67.64,57.33 70.18,57.33 71.32,56.19 JP403.12 | v139.04,40.74 v135.89,43.89 | v139.12,29.52 138.61,29.01 125.25,29.01 124.94,28.7 116.81,28.7 115.67,29.84 103.12,29.84 101.73,28.45 99.77,28.45 97.05,31.17 88.44,31.17 88.06,30.79 86.87,30.79 v86.72,30.94 | v85.57,32.13 85.19,32.51 83.84,32.51 83.49,32.87 81.28,32.87 80.9,32.49 v72.8,32.49
  Bottom 0.254: 136.17,43.89 v136.17,46.94 | 136.17,43.89 136.17,43.16 IC303.1 | v136.91,50.22 136.17,50.22 IC303.24 | v103.53,92.23 v105.28,93.98 | v91.06,91.85 89.28,90.07 89.28,86.82 88.54,86.08 IC301.27 | v65.13,59.84 65.51,60.22 65.51,81.38 64.77,82.12 64.77,87.07 68.43,90.73 68.43,91.92 70.43,93.93 v70.87,93.93 | v139.04,40.74 139.75,40.03 139.75,30.15 v139.12,29.52 | v86.72,30.94 85.57,32.08 v85.57,32.13 | v72.8,32.49 73.18,32.87 73.18,54.36 72.39,55.14 JP403.12 | v135.89,43.89 136.17,43.89
/OSC_HALT  (via drill 0.58)
  Top 0.254: v107.24,88.88 98.96,88.88 98.5,89.33 v90.73,89.33 | v89.53,84.73 89.53,87.1 89.48,87.1 88.92,87.66 IC301.26 87.61,88.24 86.82,89.03 73.79,89.03 72.34,87.58 v71.22,87.58 | v130.56,18.69 130.18,18.31 112.88,18.31 v112.72,18.16 | v117.73,10.49 116.81,9.58 115.85,9.58 115.7,9.42 112.67,9.42 112.52,9.58 104.06,9.58 v103.89,9.4 | v103.33,17.96 103.3,17.98 v71.35,17.98
  Bottom 0.254: v107.24,88.88 107.24,89.33 109.63,91.72 109.63,91.77 111.71,91.77 112.22,91.26 112.22,90.6 115.11,90.6 115.88,89.84 RN300.6 | v90.73,89.33 89.74,88.34 89.74,84.94 v89.53,84.73 | v130.56,18.69 130.56,17.5 IC103.2 | v112.72,18.16 117.42,18.16 117.42,14.61 117.47,14.55 117.47,13.54 117.42,13.49 117.42,10.79 v117.73,10.49 | v103.89,9.4 103.33,9.96 v103.33,17.96 | v71.35,17.98 70.43,18.9 70.43,24.92 71.25,25.73 71.25,33.45 70.87,33.83 70.87,59.33 71.75,60.22 JP403.16 71.75,61.7 70.97,62.48 70.97,87.33 v71.22,87.58
/SYS_RESET  (via drill 0.58)
  Top 0.254: JP405.40 13.13,94.31 13.99,93.45 38.08,93.45 38.94,94.31 JP407.40 40.44,94.31 41.58,93.17 51.99,93.17 54.29,90.49 57.7,90.49 v57.72,90.51 | v82.91,67.74 80.06,67.74 79.81,67.49 57.99,67.49 56.54,68.94 RN402.2 | v97.03,80.75 95.68,79.4 92.13,79.4 86.46,73.74 85.29,73.74 84.56,73 83.84,73 IC301.39 | v86.82,35 93.95,35 IC300.39
  Bottom 0.254: IC301.39 82.91,72.03 v82.91,67.74 83.39,67.54 85.95,67.54 86.82,66.67 86.82,61.39 87.2,61.01 87.2,35.38 v86.82,35 | v97.03,80.75 97.03,81.36 98.37,81.36 99.44,82.42 99.44,88.39 98.45,89.38 98.45,93.85 100.05,95.45 100.05,95.91 100.97,95.91 T400.3 | v57.72,90.51 58.48,89.75 58.48,70.56 56.19,69.85 RN402.2
/TRST  (via drill 0.58)
  Top 0.254: v75.26,77.17 73.48,77.17 72.82,76.5 JP403.28 | v75.26,66.65 76.05,65.86 83.49,65.86 v83.84,65.51 | v85.17,39.67 86.03,38.81 105.03,38.81 107.09,36.75 124.84,36.75 125.6,37.52 132.92,37.52 v133.02,37.41 | v138.15,46.25 138.3,46.1 141.68,46.1 144.35,48.77 v144.35,52.45 | v148.77,56.77 148.77,60.1 v148.97,60.1 | v149.07,70.92 146.66,73.33 RN405.6
  Bottom 0.254: RN405.6 144.81,74.62 143.03,76.4 143.03,76.99 142.06,77.95 140.49,77.95 140.49,79.53 139.52,80.49 137.21,80.49 137.21,85.85 135.81,87.25 134.8,87.25 134.8,93.12 135.56,93.88 JP400.9 | v75.26,66.65 v75.26,77.17 | v83.84,65.51 84.58,64.77 84.58,62.2 86.28,60.5 86.28,40.79 v85.17,39.67 | v133.02,37.41 136.22,40.62 136.73,40.62 136.73,44.83 v138.15,46.25 | v144.35,52.45 148.67,56.77 v148.77,56.77 | v148.97,60.1 149.07,60.2 v149.07,70.92
/WE0  (via drill 0.6)
  Top 0.254: JP200.14 1.17,28.26 1.17,40.03 6.5,40.03 v6.5,41.96 | IC200.31 16.51,41.05 13.51,41.05 12.8,41.66 12.09,41.66 12.09,42.77 15.44,42.77 15.85,42.37 17.98,42.37 17.98,44.09 9.25,44.09 9.25,43.28 v9.04,43.08
  Bottom 0.254: v6.5,41.96 7.82,41.96 v9.04,43.08
/WE1  (via drill 0.6)
  Top 0.254: v12.38,18.1 13.65,16.83 v17.46,16.83 | v21.04,17.17 21.3,17.17 22.86,18.73 22.86,21.27 23.34,21.75 53.66,21.75 53.82,21.59 53.82,19.53 57.31,19.53 57.63,19.84 57.63,21.27 58.42,22.07 60.8,22.07 61.28,21.59 IC201.31
  Bottom 0.254: JP200.18 4.45,32.07 4.45,21.91 7.62,21.91 7.62,20.32 8.57,19.37 11.11,19.37 v12.38,18.1 | v17.46,16.83 20.41,16.83 v21.04,17.17
A0  (via drill 0.58)
  Top 0.254: v130.81,53.09 129.67,51.94 v111.78,51.94 | RN403.2 9.55,48.62 11.51,46.66 11.63,46.66 JP405.2 | v45.26,45.77 40.72,45.77 40.44,46.05 JP407.2 | v45.92,41.73 46.18,41.99 54.38,41.99 55.52,40.84 v56.29,40.84 | v44.25,35.53 44.37,35.41 55.45,35.41 v56.29,36.25 56.64,35.92 74.7,35.92 v75.08,36.3 | v75.06,16.89 82.86,16.89 v83.92,15.82 84.4,16.03 96.47,16.03 v96.65,16.2 | v15.62,33.12 16.64,32.11 30.35,32.11 31.11,32.87 32.66,32.87 33.5,32.03 v42.09,32.03 | v114.4,22.28 114.28,22.15 99.39,22.15 v99.01,22.53
  Bottom 0.254: v111.78,51.94 111.33,51.49 111.33,44.73 110.13,43.54 IC300.14 110.13,42.19 111.38,40.95 111.38,39.88 112.45,38.81 114.3,38.81 114.3,24.97 114.4,24.87 v114.4,22.28 | v130.81,53.09 IC303.20 | IC201.12 86.69,6.07 86.69,7.26 IC203.10 86.41,9.88 83.92,12.37 v83.92,15.82 | IC202.10 42.19,6.07 42.9,6.78 42.9,21.49 42.19,22.2 IC200.12 42.19,24.79 42.19,32.03 | v45.26,45.77 46.1,44.93 46.1,41.91 v45.92,41.73 | v56.29,36.25 v56.29,40.84 | v44.25,35.53 42.19,33.48 42.19,32.03 | v75.06,16.89 75.06,30.5 75.08,30.53 v75.08,36.3 | v15.62,33.12 15.52,33.22 15.52,42.8 12.7,45.62 JP405.2 | 42.19,32.03 v42.09,32.03 | v99.01,22.53 97.84,21.36 97.84,17.4 v96.65,16.2
A1  (via drill 0.58)
  Top 0.254: RN403.3 9.55,51.16 11.51,49.2 11.63,49.2 JP405.4 13.13,48.59 13.92,47.8 30.68,47.8 | 30.68,47.8 38.15,47.8 38.94,48.59 JP407.4 | v129.62,53.24 128.88,52.5 114.5,52.5 v114.15,52.86 | v83.16,27.81 82.78,28.19 71.04,28.19 70.28,27.43 69.37,27.43 68.15,28.65 49.91,28.65 48.77,29.79 41.3,29.79 v39.62,28.12 39.32,28.5 34.98,28.5 v31.45,32.03 | v113.92,42.93 112.7,41.71 v108,41.71 | v102.16,46.56 v104.52,44.2 | v100.1,53.62 99.26,54.46 97.64,54.46 97.36,54.18 v83.92,54.18 | v30.68,45.77 30.68,47.8
  Bottom 0.254: v129.62,53.24 129.62,53.92 131.14,53.92 131.65,53.42 131.65,52.5 131.8,52.35 IC303.21 | IC300.18 109.73,51.16 109.73,53.7 113.31,53.7 v114.15,52.86 114.3,52.38 114.3,49.94 113.92,49.55 v113.92,42.93 | IC201.11 84.15,6.07 84.15,7.26 IC203.9 83.87,9.88 83.08,10.67 83.08,27.74 v83.16,27.81 83.36,28.3 84.66,29.59 84.66,35.92 84.3,36.27 84.3,53.8 v83.92,54.18 | IC202.9 39.09,6.07 38.28,6.88 38.28,21.39 39.09,22.2 IC200.11 39.62,24.79 v39.62,28.12 | v108,41.71 105.51,44.2 v104.52,44.2 | v102.16,46.56 101.04,47.68 101.04,52.68 v100.1,53.62 | v30.68,45.77 30.76,45.7 30.76,32.72 v31.45,32.03
A2  (via drill 0.58)
  Top 0.254: RN403.4 9.55,53.7 11.51,51.74 11.63,51.74 JP405.6 13.13,51.13 13.99,50.27 38.08,50.27 38.94,51.13 JP407.6 | v125.3,56.26 v133.35,56.26 | v123.88,48.79 115.49,48.79 115.09,48.39 113.41,48.39 112.83,48.97 111.25,48.97 110.52,48.23 IC300.19 | v80.54,27.36 80.16,26.98 78.46,26.98 | 78.46,26.98 69.16,26.98 67.94,28.19 48.84,28.19 47.93,27.28 38.81,27.28 v38.43,27.66 | v110.57,52.35 110.13,52.78 78.51,52.78 v78.49,52.81 | 78.46,26.98 v78.46,27.36
  Bottom 0.254: v125.3,56.26 125.3,52.76 125.09,52.55 125.09,50.01 v123.88,48.79 | v133.35,56.26 IC303.22 | IC201.10 81.61,6.07 81.61,7.26 IC203.8 81.33,9.88 80.54,10.67 v80.54,27.36 | IC202.8 37.11,6.07 37.82,6.78 37.82,21.49 37.11,22.2 IC200.10 37.11,24.79 37.11,26.34 v38.43,27.66 38.38,28.14 38.38,49.71 39.37,50.7 JP407.6 | v110.57,52.35 110.87,52.05 110.87,49.35 110.13,48.62 IC300.19 | v78.49,52.81 78.11,52.43 78.11,35.69 78.46,35.33 v78.46,27.36
A3  (via drill 0.58)
  Top 0.254: RN403.5 9.55,56.24 11.51,54.28 11.63,54.28 JP405.8 13.13,53.67 13.99,52.81 35.2,52.81 | 35.2,52.81 38.08,52.81 38.94,53.67 JP407.8 | v134.19,53.09 132.21,51.1 112.62,51.1 | 112.62,51.1 110.69,51.1 110.29,51.51 108.71,51.51 107.97,50.77 IC300.20 | v77.62,35 77.24,34.62 72.42,34.62 72.03,35 61.42,35 60.66,34.24 35.38,34.24 v35,34.62 | v114.76,49.23 114.55,49.43 112.62,49.43 112.62,51.1 | v115.14,28.55 113.84,27.25 100.56,27.25 v100.23,27.58 | v96.14,14.53 79.58,14.53 v79.53,14.58 | v35.2,51.1 35.2,52.81
  Bottom 0.254: v134.19,53.09 134.19,52.5 134.34,52.35 IC303.23 | IC201.9 79.07,6.07 79.07,7.26 IC203.7 78.79,9.88 78.79,14.58 | IC202.7 34.57,6.07 35.36,6.86 35.36,21.41 34.57,22.2 IC200.9 34.57,24.79 34.57,34.19 v35,34.62 35.28,35.03 35.28,51.03 v35.2,51.1 | 78.79,14.58 78.79,18.16 77.62,19.33 v77.62,35 | v114.76,49.23 115.14,48.84 v115.14,28.55 | v100.23,27.58 99.85,27.2 99.85,18.24 v96.14,14.53 | 78.79,14.58 v79.53,14.58
A4  (via drill 0.58)
  Top 0.254: RN403.6 9.55,58.78 11.51,56.82 11.63,56.82 JP405.10 13.13,56.21 13.92,55.42 38.15,55.42 38.94,56.21 JP407.10 | v104.17,54.76 102.29,56.64 78.54,56.64 v78.49,56.69 | v75.95,35.46 61.21,35.46 60.45,34.7 43.92,34.7 43.16,35.46 32.03,35.46 v31.9,35.33 31.42,35.53 31.11,35.84 20.98,35.84 v20.57,35.43 | v10.44,41.02 10.46,41.05 12.6,41.05 13.16,40.49 14.43,40.49 15.52,39.37 15.52,33.96 16.61,33.96 17.63,32.94 v19.63,32.94
  Bottom 0.254: IC202.6 31.47,6.07 30.76,6.78 30.76,21.49 31.47,22.2 IC200.8 32.03,24.79 32.28,25.04 32.28,34.95 v31.9,35.33 | IC201.8 76.53,6.07 76.53,7.26 IC203.6 76.25,9.88 76.25,16.87 75.51,17.6 75.51,24.92 75.92,25.32 75.92,35.46 | v104.17,54.76 104.17,51.49 104.5,51.16 IC300.22 | v78.49,56.69 77.27,55.47 77.27,37.52 75.92,36.17 75.92,35.46 | v75.95,35.46 75.92,35.46 | v10.44,41.02 10.44,54.15 12.06,55.78 JP405.10 | v19.63,32.94 20.57,33.88 v20.57,35.43
A5  (via drill 0.58)
  Top 0.254: v100.1,54.81 99.06,55.85 v74.83,55.85 | RN403.7 9.55,61.32 11.51,59.36 11.63,59.36 JP405.12 13.13,58.75 13.99,57.89 28.98,57.89 | 28.98,57.89 38.08,57.89 38.94,58.75 JP407.12 40.23,58.55 48.44,50.34 51.89,50.34 52.4,50.85 59.51,50.85 63.2,47.17 73.99,47.17 v74.02,47.14 | v28.96,27.2 28.07,28.09 v26.82,28.09 | v28.98,57.78 28.98,57.89
  Bottom 0.254: IC201.7 73.99,6.07 73.99,7.26 IC203.5 73.71,9.88 73.71,14.61 72.97,15.34 72.97,30.76 73.64,31.42 73.64,47.14 | v100.1,54.81 101.5,53.42 101.5,51.61 101.96,51.16 IC300.24 | v74.83,55.85 73.64,54.66 73.64,47.14 | IC202.5 29.49,6.07 30.3,6.88 30.3,21.39 29.49,22.2 IC200.7 28.96,24.79 v28.96,27.2 | v26.82,28.09 26.24,28.68 26.24,37.08 25.68,37.64 25.68,39.83 27.61,41.76 28.98,41.76 28.98,42.93 28.93,42.98 28.93,57.73 v28.98,57.78 | v74.02,47.14 73.64,47.14
A6  (via drill 0.58)
  Top 0.254: JP405.14 11.63,61.9 11.51,61.9 9.55,63.86 RN403.8 7.32,63.5 v2.44,58.62 | v4.45,10.16 4.8,9.8 11.91,9.8 v15.93,5.79 | v20.14,3.25 20.14,5.97 20.7,5.97 21.16,6.43 25.32,6.43 26.04,5.71 IC202.4 | v96.14,12.72 95.76,12.34 83.34,12.34 82.4,13.28 78.99,13.28 78,14.28 v72.87,14.28 66.19,14.28 v66.09,14.38 | v44.42,56.44 40.01,60.86 JP407.14 | v45.26,42.82 45.52,42.57 47.14,42.57 47.27,42.44 v55.09,42.44 | v55.45,21.01 v55.45,23.55 | v29.46,14.99 29.84,15.37 v54.66,15.37
  Bottom 0.254: 25.68,14.99 25.68,21.49 26.39,22.2 IC200.6 | 25.68,14.99 25.68,6.78 26.39,6.07 IC202.4 | v2.44,58.62 2.08,58.27 2.08,12.52 v4.45,10.16 | v15.93,5.79 18.62,3.1 20.14,3.1 v20.14,3.25 | IC201.6 71.45,6.07 71.45,7.26 IC203.4 71.7,9.88 71.7,13.11 v72.87,14.28 | v96.14,12.72 101.07,17.65 101.07,27.91 100.56,28.42 100.56,29.62 100.71,29.77 100.71,33.33 101.96,34.57 IC300.1 | v44.42,56.44 44.42,43.66 v45.26,42.82 | v55.09,42.44 55.45,42.09 v55.45,23.55 | v55.45,21.01 54.3,19.86 54.3,17.17 55.38,16.09 | 55.38,16.09 57.1,14.38 v66.09,14.38 | 25.68,14.99 v29.46,14.99 | v54.66,15.37 55.38,16.09
A7  (via drill 0.58)
  Top 0.254: RN403.9 9.55,66.4 11.51,64.44 11.63,64.44 JP405.16 13.13,63.83 13.99,62.97 38.08,62.97 38.94,63.83 JP407.16 47.35,64.14 48.44,63.04 56.82,63.04 57.33,63.55 61.37,63.55 v63.93,60.98 | v100.28,13.56 100.15,13.69 82.65,13.69 82.6,13.74 79.2,13.74 77.83,15.11 v71.88,15.11 | v24.84,12.65 v57.73,12.65 | v66.09,12.65 66.27,12.47 v69.06,12.47 | v62.46,23.42 62.46,22.3 62.81,21.95 62.81,18.59 62.89,18.52 v62.89,12.75
  Bottom 0.254: 23.14,12.65 23.14,21.49 23.85,22.2 IC200.5 | 23.14,12.65 23.14,6.78 23.85,6.07 IC202.3 | IC201.5 68.91,6.07 68.91,7.26 IC203.3 69.16,9.88 69.16,12.39 | v100.28,13.56 101.98,15.27 101.98,24.41 102.23,24.66 IC300.44 | 69.16,12.39 v71.88,15.11 | 62.89,12.65 v66.09,12.65 | v57.73,12.65 62.89,12.65 | 23.14,12.65 v24.84,12.65 | v69.06,12.47 69.16,12.39 | v63.93,60.98 64.29,60.63 64.29,52.55 65.33,51.51 65.33,23.22 64.26,22.15 63.22,22.15 63.22,22.3 62.46,23.06 v62.46,23.42 | 62.89,12.65 v62.89,12.75
A8  (via drill 0.58)
  Top 0.254: IC300.43 99.03,35 98.37,35 97.1,33.73 88.37,33.73 87.61,32.97 84.05,32.97 82.86,34.16 v71.7,34.16 63.37,34.16 62.53,33.33 33.53,33.33 33.07,33.78 27.58,33.78 v27.28,34.16 26.9,33.78 v17.96,33.78 | JP407.18 38.94,66.37 38.15,65.58 35.46,65.58 34.65,66.4 RN404.2 32.03,66.4 31.67,66.04 v29.82,66.04 | v18.92,63.8 17.5,65.23 14.28,65.23 13.13,66.37 JP405.18
  Bottom 0.254: IC201.27 71.45,21.31 71.45,22.5 IC203.25 71.7,25.12 v71.7,34.16 | 27.66,34.16 27.66,36.73 26.95,37.44 IC200.27 27.3,39.42 29.44,41.55 29.44,43.13 29.39,43.18 29.39,46.3 29.82,46.74 v29.82,66.04 | 27.66,34.16 27.66,22.02 26.95,21.31 IC202.25 | v18.92,63.8 18.92,40.69 17.96,39.73 v17.96,33.78 | 27.66,34.16 v27.28,34.16
A9  (via drill 0.58)
  Top 0.254: v83.82,35.59 84.51,36.27 95.28,36.27 96.5,37.49 IC300.38 | v83.16,32.03 82.83,31.7 75.08,31.7 v74.24,30.86 v69.11,30.86 | v30.84,68.61 31.7,68.61 32.03,68.94 RN404.3 32.38,69.85 31.67,69.85 31.67,72.19 32.23,72.75 34.95,72.75 v35.33,72.36 | v5.77,63.12 5.77,66.27 7.16,67.67 10.39,67.67 11.63,68.91 JP405.20 | v5.77,37.72 12.68,37.72 v12.68,37.21 | v14.07,41.94 14.3,41.86 18.92,41.86 18.92,40.39 18.62,40.39 18.06,39.83 18.06,35.46 v18.8,35.46 | v19.2,29.84 19.48,29.57 v29.82,29.57 | v67,25.98 66.62,26.36 61.82,26.36 v56.64,21.18 | v55.14,17.5 54.76,17.88 29.84,17.88 v29.46,17.5
  Bottom 0.254: IC201.26 73.99,21.31 73.99,22.5 IC203.24 74.24,25.12 v74.24,30.86 | v83.82,35.59 83.16,34.92 v83.16,32.03 | 28.12,31.24 28.12,36.63 28.93,37.44 IC200.26 29.49,40.03 29.9,40.44 29.9,43.33 29.84,43.38 29.84,46.1 30.66,46.91 30.66,68.43 v30.84,68.61 | 28.12,31.24 28.12,22.12 28.93,21.31 IC202.24 29.46,18.69 v29.46,17.5 | v5.77,37.72 5.08,37.72 5.08,45.06 5.77,45.77 v5.77,63.12 | v12.68,37.21 13.03,37.21 13.41,36.85 15.01,36.85 15.01,41.17 v14.07,41.94 | v18.8,35.46 18.8,30.25 v19.2,29.84 | v29.82,29.57 29.79,29.59 29.79,30.73 29.29,31.24 28.12,31.24 | v35.33,72.36 35.33,94.39 36.52,95.58 36.52,95.71 37.64,95.71 38.25,95.1 38.25,71.07 39.37,69.95 JP407.20 | v69.11,30.86 67,28.75 v67,25.98 | v56.64,21.18 56.29,20.83 56.29,18.64 v55.14,17.5
A10  (via drill 0.58)
  Top 0.254: v83.46,37.72 93.95,37.72 IC300.37 | RN404.4 34.65,71.48 35.46,70.66 38.15,70.66 38.94,71.45 JP407.22 40.32,73.13 v45.36,75.63 | v5.33,67 6.45,68.12 8.31,68.12 11.63,71.45 JP405.22 | v4.47,34.67 4.47,29.36 6.63,29.36 8.99,27 v11.18,27 | v13.92,25.53 14.3,25.15 14.68,25.15 14.78,25.04 15.98,25.04 16.08,25.15 22.02,25.15 22.58,24.59 22.58,21.97 22.15,21.97 21.84,21.67 21.16,21.67 20.28,20.79 20.28,18.02 20.04,18.02 20.04,15.6 21.01,15.6 23.42,18.01 25.89,18.02 26.21,18.34 35.48,18.34 36.2,19.05 IC202.21 | v81.86,48.56 80.59,49.84 v75.97,49.84 | v64.69,94.82 57.96,88.09 48.44,88.09 v45.74,85.39
  Bottom 0.254: IC201.23 81.61,21.31 81.61,22.5 IC203.21 81.86,25.12 81.86,37.72 | 81.86,37.72 v83.46,37.72 | IC202.21 36.55,21.31 35.84,22.02 35.84,36.73 36.55,37.44 IC200.23 36.55,40.03 36.04,40.54 36.04,69.37 34.29,71.12 RN404.4 | v5.33,67 4.47,66.14 v4.47,34.67 | v11.18,27 12.65,25.53 v13.92,25.53 | v75.97,49.84 75.67,50.14 75.67,64.16 74.42,65.41 74.42,94.26 73.86,94.82 v64.69,94.82 | v45.74,85.39 45.36,85.01 v45.36,75.63 | v81.86,48.56 81.86,37.72
A11  (via drill 0.58)
  Top 0.254: v77.8,3.43 78.13,3.1 104.34,3.1 105.08,3.83 IC100.1 | v86.36,39.65 86.72,39.29 95.76,39.29 96.5,40.03 IC300.36 | v85.5,35.43 84.81,34.75 79.05,34.75 77.7,36.09 v77.01,36.09 | JP407.24 38.94,73.99 38.15,73.2 35.46,73.2 34.65,74.02 RN404.5 32.03,74.02 31.22,73.2 29.95,73.2 | 29.95,73.2 13.92,73.2 13.13,73.99 JP405.24 | v31.52,60.98 30.38,62.13 v28.98,62.13 | v28.98,70.99 29.95,71.96 29.95,73.2 | v56.59,8.99 54.61,10.97 v34.52,10.97
  Bottom 0.254: v86.36,39.65 85.5,38.79 v85.5,35.43 | v77.01,36.09 76.78,35.87 76.78,25.12 IC203.23 76.53,22.5 76.53,21.31 IC201.25 76.78,18.69 76.78,11.94 77.52,11.2 77.52,3.71 v77.8,3.43 77.32,3.23 77.06,2.97 67.36,2.97 67.36,9.68 66.8,10.24 65.51,10.24 65.51,9.83 64.82,9.14 64.82,7.47 64.26,6.91 56.59,6.91 v56.59,8.99 | v31.52,60.98 31.52,40.03 IC200.25 32.03,37.44 32.74,36.73 32.74,22.02 32.03,21.31 IC202.23 32.03,18.69 32.03,13.46 v34.52,10.97 | v28.98,62.13 v28.98,70.99
A12  (via drill 0.58, 0.6)
  Top 0.254: JP405.26 13.13,76.53 13.99,75.67 31.14,75.67 32.03,76.56 RN404.6 34.65,76.56 35.46,75.74 38.15,75.74 38.94,76.53 JP407.26 40.01,77.15 46.35,77.15 46.67,76.83 46.67,75.25 44.77,73.34 v44.45,73.34 | v57.66,3.25 57.51,3.1 22.94,3.1 22.23,3.81 IC202.2 | v95.68,17.14 95.71,17.12 105.08,17.12 IC101.1 | IC201.4 67,5.69 67.74,6.43 106.88,6.43 107.62,5.69 IC100.2 | IC300.35 87.31,40.32 87,40.64 84.45,40.64 82.87,39.05 80.64,39.05 80.01,39.69 74.3,39.69 72.71,38.1 70.17,38.1 66.99,41.27 62.87,41.27 v62.87,40.96 | v46.04,61.59 46.04,58.1 45.72,57.78 45.72,54.93 47.94,52.7 56.2,52.7 57.15,53.66 59.69,53.66 v62.55,50.8
  Bottom 0.254: v57.66,3.25 58.17,3.25 58.17,3.23 58.29,3.1 65.71,3.1 65.71,3.83 IC201.4 66.37,6.07 66.37,7.26 IC203.2 | IC100.2 108,6.07 104.72,9.35 104.72,14.15 105.46,14.88 IC101.1 | v95.68,17.14 95.68,38.86 94.89,39.65 IC300.35 | v44.45,73.34 46.04,71.75 v46.04,61.59 | v62.55,50.8 62.55,45.4 62.87,45.09 v62.87,40.96
A12ORA13ORA14
  Bottom 0.254: IC102.1 128.91,3.81 129.62,3.1 140.34,3.1 140.34,3.81 IC102.6
A13  (via drill 0.58)
  Top 0.254: v104.52,42.6 97.81,42.6 IC300.34 | v106.2,31.45 105.05,30.3 102.41,30.3 v101.4,29.29 | RN404.7 34.65,79.65 35.46,80.47 38.15,80.47 38.94,79.68 JP407.28 | 11.28,72.85 11.28,77.85 12.06,78.64 JP405.28 | 11.28,72.85 12.88,72.85 13.82,71.91 13.82,70.31 18.9,70.31 23.98,65.23 29.46,65.23 29.49,65.2 v31.5,65.2 | v57.73,15.21 56.67,14.15 24.82,14.15 v24,14.96 23.52,14.76 v20.32,11.56 | v66.09,16.92 68.25,19.07 IC201.28 69.32,18.85 72.11,16.05 79.22,16.05 80.29,14.99 84.25,14.99 84.63,15.37 98.27,15.37 v99.11,14.53 | v5.74,68.58 6.99,68.58 11.18,72.77 11.28,72.85 | v1.98,11.46 v16.97,11.46
  Bottom 0.254: IC101.3 111.07,14.88 111.81,14.15 111.81,11.81 113.08,10.54 113.08,8.08 111.07,6.07 IC100.3 110.16,3.83 110.16,3.1 107.82,3.1 106.98,3.94 106.98,6.43 105.69,6.43 99.44,12.68 99.44,13.89 99.58,14.03 | v104.52,42.6 105.16,41.96 105.16,36.32 106.2,35.28 v106.2,31.45 | v101.4,29.29 101.52,29.16 101.52,15.98 99.58,14.03 | v31.5,65.2 31.67,65.38 31.67,78.03 32.38,78.74 RN404.7 | v24,14.96 24,18.69 IC202.26 | v57.73,15.21 59.44,16.92 v66.09,16.92 | IC203.26 68.91,22.5 68.91,21.31 IC201.28 | v5.74,68.58 1.6,64.44 1.6,11.84 v1.98,11.46 | v16.97,11.46 20.32,11.46 v20.32,11.56 | v99.11,14.53 99.11,14.5 99.58,14.03
A14  (via drill 0.58)
  Top 0.254: RN404.8 32.03,81.64 31.14,80.75 13.99,80.75 13.13,81.61 JP405.30 12.06,81.18 v6.6,75.72 | v59,8.15 36.17,8.15 34.11,10.21 26.54,10.21 23.88,7.54 21.06,7.54 19.46,5.94 IC202.1 | 82.7,40.54 70.18,40.54 v70.03,40.39 | 82.7,40.54 82.72,40.54 83.03,40.79 83.5,41.27 88.58,41.27 88.9,40.96 92.71,40.96 93.95,42.2 93.95,42.57 IC300.33 | v80.49,77.17 79.65,78 74.93,78 74.57,77.65 69.04,77.65 68.71,77.98 62.61,77.98 60.12,80.47 48.79,80.47 47.98,81.28 40.77,81.28 40.44,81.61 JP407.30 | 82.7,40.54 v82.7,40.64 | v114.73,10.72 99.03,10.72 98.32,11.43 78.79,11.43 78.79,12.83 78.23,13.39 v67.06,13.39 | v7.21,34.16 8.1,33.12 8.1,29.67 v11.3,29.67 | v20.07,26.72 v14.25,26.72
  Bottom 0.254: 114.88,10.72 114.88,14.15 115.62,14.88 IC101.5 | 114.88,10.72 114.88,7.34 113.61,6.07 IC100.4 | v59,8.15 59.64,7.52 63.17,7.52 63.17,7.64 IC203.1 64.29,9.68 66.93,12.32 66.93,13.39 | 66.93,18.39 66.62,18.69 IC201.29 | 66.93,13.39 66.93,18.39 | v70.03,40.39 70.41,40.01 70.41,28.98 70.79,28.6 70.79,25.93 69.9,25.04 69.9,18.9 69.34,18.34 67.03,18.34 66.93,18.39 | v80.49,77.17 80.19,76.86 80.19,67.87 81.03,67.03 81.03,54.33 81.41,53.95 81.41,50.19 82.7,48.9 82.7,45.72 82.63,45.64 82.63,40.72 v82.7,40.64 | v114.73,10.72 114.88,10.72 | 66.93,13.39 v67.06,13.39 | v6.6,75.72 6.6,44.86 5.66,43.94 5.66,39.65 6.6,38.71 6.6,36.73 7.21,36.07 v7.21,34.16 | v14.25,26.72 v11.3,29.67 | v20.07,26.72 21.64,25.15 22.68,25.15 22.68,11.43 19.33,8.08 19.33,6.07 IC202.1
A15  (via drill 0.58)